# EAGLE board PFE (EAGLE 9.6.2)
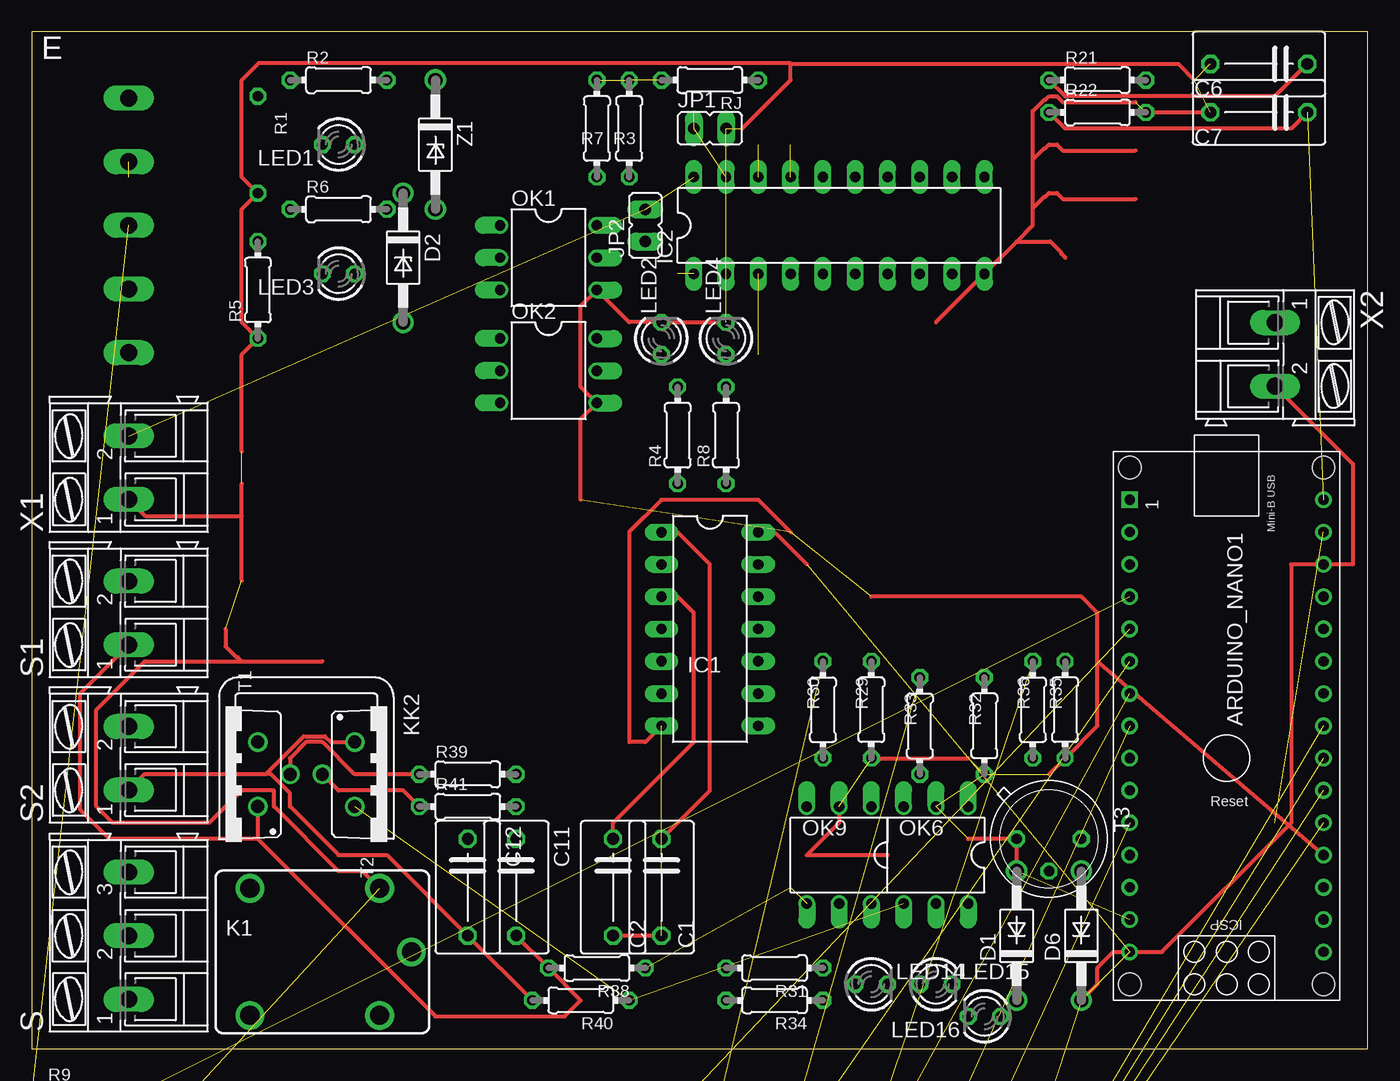
[diagram p0: board, top side]
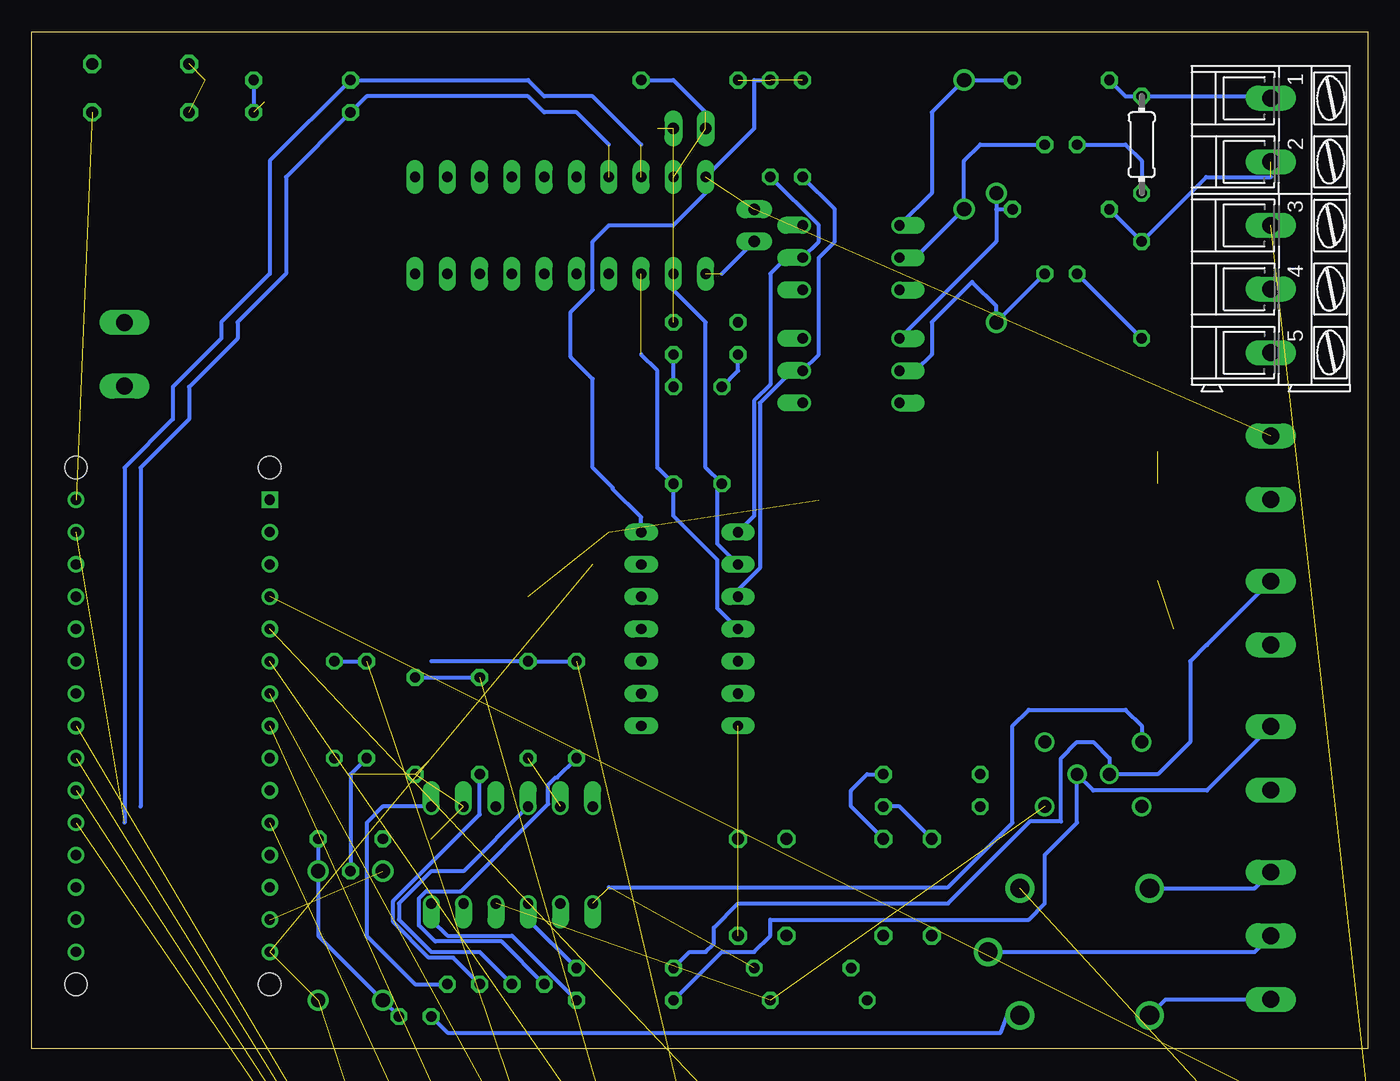
[diagram p1: board, bottom side, seen from below]

Size 105.08 x 80 mm. Coordinates in mm from the lower left corner, seen from the top.
Outline: 0,0 105.08,0 105.08,80 0,80 0,0
Copper layers (1*16): Top 0.035mm / dielectric 1.5mm / Bottom 0.035mm
Design rules "default": minimum track width 6mil, minimum drill 0.35mm, track to track 6mil, track to pad 6mil, pad to pad 6mil, via to via 6mil, smd to smd 6mil, copper to edge 40mil, drill to drill 6mil, minimum pad ring 10mil, minimum via ring 8mil, stop-mask expansion 4mil, vias tented up to drill 0mil, thermal gap 10mil

## Footprints (pad centres in the part's own frame; a part is rotated, then mirrored left to right if it is on the bottom)
ARDUINO_NANO = drill 0.8 square: 1 -20.32,-7.62 | drill 0.8: 2 -17.78,-7.62; 3 -15.24,-7.62; 4 -12.7,-7.62; 5 -10.16,-7.62; 6 -7.62,-7.62; 7 -5.08,-7.62; 8 -2.54,-7.62; 9 0,-7.62; 10 2.54,-7.62; 11 5.08,-7.62; 12 7.62,-7.62; 13 10.16,-7.62; 14 12.7,-7.62; 15 15.24,-7.62; 16 15.24,7.62; 17 12.7,7.62; 18 10.16,7.62; 19 7.62,7.62; 20 5.08,7.62; 21 2.54,7.62; 22 0,7.62; 23 -2.54,7.62; 24 -5.08,7.62; 25 -7.62,7.62; 26 -10.16,7.62; 27 -12.7,7.62; 28 -15.24,7.62; 29 -17.78,7.62; 30 -20.32,7.62 | hole 1.778: -22.86,-7.62; -22.86,7.62; 17.78,7.62; 17.78,-7.62
C075-052X106 = drill 0.914 octagon: 1 -3.81,0; 2 3.81,0
DO41-10 = drill 1.118: A 5.08,0; C -5.08,0
DO41Z10 = drill 1.118: A 5.08,0; C -5.08,0
AK300/5 = drill 1.321 long: 1 -10.008,0; 2 -5.004,0; 3 0,0; 4 5.004,0; 5 10.008,0
DIL14 = drill 0.813 long: 1 -7.62,-3.81; 2 -5.08,-3.81; 3 -2.54,-3.81; 4 0,-3.81; 5 2.54,-3.81; 6 5.08,-3.81; 7 7.62,-3.81; 8 7.62,3.81; 9 5.08,3.81; 10 2.54,3.81; 11 0,3.81; 12 -2.54,3.81; 13 -5.08,3.81; 14 -7.62,3.81
DIL20 = drill 0.813 long: 1 -11.43,-3.81; 2 -8.89,-3.81; 3 -6.35,-3.81; 4 -3.81,-3.81; 5 -1.27,-3.81; 6 1.27,-3.81; 7 3.81,-3.81; 8 6.35,-3.81; 9 8.89,-3.81; 10 11.43,-3.81; 11 11.43,3.81; 12 8.89,3.81; 13 6.35,3.81; 14 3.81,3.81; 15 1.27,3.81; 16 -1.27,3.81; 17 -3.81,3.81; 18 -6.35,3.81; 19 -8.89,3.81; 20 -11.43,3.81
JP1 = drill 0.914 long: 1 0,-1.27; 2 0,1.27
CQ1 = drill 1.5: 1 4.5,-5; 2 4.5,5; C 7,0; NC -5.7,-5; NO -5.7,5
LED3MM = drill 0.813 octagon: A -1.27,0; K 1.27,0
DIL06 = drill 0.813 offset: 1 -2.54,-3.81; 2 0,-3.81; 3 2.54,-3.81; 4 2.54,3.81; 5 0,3.81; 6 -2.54,3.81
0204/7 = drill 0.813 octagon: 1 -3.81,0; 2 3.81,0
AK300/3 = drill 1.321 long: 1 -5.004,0; 2 0,0; 3 5.004,0
AK300/2 = drill 1.321 long: 1 -2.515,0; 2 2.489,0
SOT78A = drill 1.016: G 2.54,0; T1 -2.54,0; T2 0,-2.54
TO5 = drill 0.813 octagon: 1 0,-2.54; 2 2.54,0; 3 0,2.54
DIL18 = drill 0.813 long: 1 -10.16,-3.81; 2 -7.62,-3.81; 3 -5.08,-3.81; 4 -2.54,-3.81; 5 0,-3.81; 6 2.54,-3.81; 7 5.08,-3.81; 8 7.62,-3.81; 9 10.16,-3.81; 10 10.16,3.81; 11 7.62,3.81; 12 5.08,3.81; 13 2.54,3.81; 14 0,3.81; 15 -2.54,3.81; 16 -5.08,3.81; 17 -7.62,3.81; 18 -10.16,3.81

## Placement (x,y rotation side)
ARDUINO_NANO1  [ARDUINO_NANO]  93.98,22.86 270 top
C1  [C075-052X106]  49.53,12.7 270 top
C2  [C075-052X106]  45.72,12.7 270 top
C6  [C075-052X106]  96.52,77.47 180 top
C7  [C075-052X106]  96.52,73.66 180 top
C11  [C075-052X106]  38.1,12.7 270 top
C12  [C075-052X106]  34.29,12.7 270 top
D1  1N4004  [DO41-10]  77.47,8.89 90 top
D2  1N4728  [DO41Z10]  29.21,62.23 270 top
D3  1N4728  [DO41Z10]  5.08,-13.97 0 top  (outside the outline)
D4  1N4728  [DO41Z10]  5.08,-36.83 0 top  (outside the outline)
D5  1N4728  [DO41Z10]  5.08,-64.77 0 top  (outside the outline)
D6  1N4004  [DO41-10]  82.55,8.89 90 top
D7  1N4728  [DO41Z10]  5.08,-92.71 0 top  (outside the outline)
D8  1N4728  [DO41Z10]  5.08,-120.65 0 top  (outside the outline)
E  [AK300/5]  7.62,64.77 270 bottom
E1  [AK300/5]  12.7,-26.67 0 top  (outside the outline)
E2  [AK300/5]  12.7,-54.61 0 top  (outside the outline)
E3  [AK300/5]  12.7,-82.55 0 top  (outside the outline)
E4  [AK300/5]  12.7,-110.49 0 top  (outside the outline)
IC1  74HC14N  [DIL14]  53.34,33.02 270 top
IC2  74HC245N  [DIL20]  63.5,64.77 0 top
JP1  [JP1]  53.34,72.39 270 top
JP2  [JP1]  48.26,64.77 0 top
K1  CQ1-12V  [CQ1]  22.86,7.62 0 top
KK2  D01S  [D01S]  21.59,27.94 180 top
LED1  TLLY4400  [LED3MM]  24.13,71.12 180 top
LED2  TLLY4400  [LED3MM]  49.53,55.88 90 top
LED3  TLLY4400  [LED3MM]  24.13,60.96 180 top
LED4  TLLY4400  [LED3MM]  54.61,55.88 90 top
LED5  TLLY4400  [LED3MM]  1.27,-130.81 0 top  (outside the outline)
LED6  TLLY4400  [LED3MM]  1.27,-135.89 0 top  (outside the outline)
LED7  TLLY4400  [LED3MM]  1.27,-140.97 0 top  (outside the outline)
LED8  TLLY4400  [LED3MM]  1.27,-146.05 0 top  (outside the outline)
LED9  TLLY4400  [LED3MM]  1.27,-170.18 0 top  (outside the outline)
LED14  TLLY4400  [LED3MM]  66.04,5.08 0 top
LED15  TLLY4400  [LED3MM]  71.12,5.08 0 top
LED16  TLLY4400  [LED3MM]  74.93,2.54 180 top
OK1  4N37  [DIL06]  40.64,62.23 270 top
OK2  4N37  [DIL06]  40.64,53.34 270 top
OK6  MOC3021M  [DIL06]  71.12,15.24 180 top
OK9  MOC3021M  [DIL06]  63.5,15.24 180 top
R1  [0204/7]  17.78,71.12 90 bottom
R2  [0204/7]  24.13,76.2 0 top
R3  [0204/7]  46.99,72.39 90 top
R4  [0204/7]  50.8,48.26 90 top
R5  [0204/7]  17.78,59.69 90 top
R6  [0204/7]  24.13,66.04 0 top
R7  [0204/7]  44.45,72.39 90 top
R8  [0204/7]  54.61,48.26 90 top
R9  [0204/7]  3.81,-3.81 0 top  (outside the outline)
R10  [0204/7]  3.81,-8.89 0 top  (outside the outline)
R11  [0204/7]  3.81,-151.13 0 top  (outside the outline)
R12  [0204/7]  16.51,-36.83 0 top  (outside the outline)
R13  [0204/7]  3.81,-43.18 0 top  (outside the outline)
R14  [0204/7]  16.51,-64.77 0 top  (outside the outline)
R15  [0204/7]  3.81,-71.12 0 top  (outside the outline)
R16  [0204/7]  16.51,-92.71 0 top  (outside the outline)
R17  [0204/7]  3.81,-99.06 0 top  (outside the outline)
R18  [0204/7]  16.51,-120.65 0 top  (outside the outline)
R19  [0204/7]  3.81,-127 0 top  (outside the outline)
R20  [0204/7]  3.81,-156.21 0 top  (outside the outline)
R21  [0204/7]  83.82,76.2 0 top
R22  [0204/7]  83.82,73.66 0 top
R23  [0204/7]  3.81,-161.29 0 top  (outside the outline)
R24  [0204/7]  3.81,-166.37 0 top  (outside the outline)
R25  [0204/7]  3.81,-175.26 0 top  (outside the outline)
R29  [0204/7]  66.04,26.67 90 top
R30  [0204/7]  62.23,26.67 270 top
R31  [0204/7]  58.42,6.35 180 top
R32  [0204/7]  74.93,25.4 90 top
R33  [0204/7]  69.85,25.4 270 top
R34  [0204/7]  58.42,3.81 180 top
R35  [0204/7]  81.28,26.67 90 top
R36  [0204/7]  78.74,26.67 270 top
R38  [0204/7]  44.45,6.35 180 top
R39  [0204/7]  34.29,21.59 0 top
R40  [0204/7]  43.18,3.81 180 top
R41  [0204/7]  34.29,19.05 0 top
RJ  [0204/7]  53.34,76.2 180 top
S  [AK300/3]  7.62,8.89 90 top
S1  [AK300/2]  7.62,34.29 90 top
S2  [AK300/2]  7.62,22.86 90 top
T1  BTA316-600B  [SOT78A]  17.78,21.59 90 top
T2  BTA316-600B  [SOT78A]  25.4,21.59 270 top
T3  2N2219  [TO5]  80.01,16.51 270 top
ULN2803A1  [DIL18]  12.7,-182.88 0 top  (outside the outline)
X1  [AK300/2]  7.62,45.72 90 top
X2  [AK300/2]  97.79,54.61 270 top
Z1  1N4728  [DO41Z10]  31.75,71.12 270 top

## Library data of the parts
ARDUINO_NANO1 = ArduinoNanoV30
C1 C2 C6 C7 C11 C12 = rcl; SPICEPREFIX: C
D1-D8 Z1 = diode
E E1-E4 S S1 S2 X1 X2 = con-ptr500; OC_FARNELL: unknown; OC_NEWARK: unknown
IC1 IC2 = 74xx-eu
JP1 JP2 = jumper
K1 = relay; OC_FARNELL: unknown; OC_NEWARK: unknown
KK2 = heatsink
LED1-LED9 LED14-LED16 = led; MF: VISHAY SEMICONDUCTOR; OC_FARNELL: 1612439
OK1 OK2 = optocoupler; MF: FAIRCHILD SEMICONDUCTOR; MPN: 4N37; OC_FARNELL: 1612456; OC_NEWARK: 72K9948
OK6 OK9 = optocoupler; MF: FAIRCHILD SEMICONDUCTOR; MPN: MOC3021-M; OC_FARNELL: 1021365; OC_NEWARK: 95B7895
R1-R25 R29-R36 R38-R41 RJ = rcl; SPICEPREFIX: R
T1 T2 = nxp_60; 12NC: 9340 600 72127
T3 = transistor
ULN2803A1 = uln-udn

## Nets
5V: ARDUINO_NANO1.12
GND: ARDUINO_NANO1.14 ARDUINO_NANO1.19 C1.2 C2.2 C6.2 C7.2 D1.A D3.A IC1.7 IC2.10 JP1.2 K1.2 LED1.K LED2.K LED3.K LED4.K OK1.4 OK2.4 OK6.2 OK9.2 R1.1 R5.1 R10.2 R21.2 R22.2 R29.1 R32.1 R35.1 T3.1 ULN2803A1.8 ULN2803A1.9 X1.1
GND1: D4.A R13.2
GND2: D5.A R15.2
GND3: D7.A R17.2
GND4: D8.A R19.2
N$1: E.1 R1.2 R2.1
N$2: D2.A LED3.A OK2.2
N$3: OK1.1 R2.2 Z1.C
N$4: C1.1 IC1.1 OK1.5 R3.1
N$6: D2.C OK2.1 R6.2
N$7: ARDUINO_NANO1.11 LED9.A
N$8: E.2 R5.2 R6.1
N$9: C2.1 IC1.3 OK2.5 R7.1
N$10: LED6.K R20.1
N$11: ARDUINO_NANO1.4 D3.C R9.2 R10.1
N$12: ARDUINO_NANO1.29 C6.1 IC2.18 R21.1
N$13: E.3 R9.1
N$15: LED4.A R8.2
N$16: E1.3 R12.1
N$18: LED1.A OK1.2 Z1.A
N$19: IC1.4 IC2.3 R8.1
N$20: ARDUINO_NANO1.6 D5.C R14.2 R15.1
N$21: E2.3 R14.1
N$22: LED7.K R23.1
N$23: E3.3 R16.1
N$24: ARDUINO_NANO1.22 LED7.A
N$25: IC2.19 JP1.1 RJ.1
N$26: LED14.A R30.2
N$27: E4.3 R18.1
N$28: OK6.4 R40.1 T2.G
N$29: R32.2 R33.1 ULN2803A1.15
N$30: ARDUINO_NANO1.5 D4.C R12.2 R13.1
N$31: LED2.A R4.2
N$32: R25.2 ULN2803A1.1
N$34: ARDUINO_NANO1.7 D7.C R16.2 R17.1
N$35: LED14.K OK9.1
N$36: ARDUINO_NANO1.8 D8.C R18.2 R19.1
N$38: LED15.A R33.2
N$39: IC2.1 JP2.1
N$40: ARDUINO_NANO1.23 LED8.A
N$41: R11.2 ULN2803A1.2
N$42: LED15.K OK6.1
N$43: ARDUINO_NANO1.30 C7.1 IC2.17 R22.1
N$44: IC1.2 IC2.2 R4.1
N$45: LED5.K R11.1
N$46: LED8.K R24.1
N$47: R36.2 T3.2
N$48: K1.NO S.3
N$49: LED9.K R25.1
N$50: R20.2 ULN2803A1.3
N$51: ARDUINO_NANO1.20 LED5.A
N$52: R23.2 ULN2803A1.4
N$53: OK9.4 R38.1 T1.G
N$55: R35.2 R36.1 ULN2803A1.16
N$56: D1.C D6.A LED16.A T3.3
N$57: OK9.6 R31.1
N$58: OK6.6 R34.1
N$59: R31.2 R39.1 S1.2 T1.T2
N$60: R29.2 R30.1 ULN2803A1.14
N$61: C11.1 R39.2
N$62: C12.1 R41.2
N$63: K1.NC S.1
N$64: K1.C S.2
N$65: C11.2 R38.2 S1.1 T1.T1
N$66: ARDUINO_NANO1.21 LED6.A
N$67: R34.2 R41.1 S2.2 T2.T2
N$68: K1.1 LED16.K
N$70: R24.2 ULN2803A1.5
N$71: C12.2 R40.2 S2.1 T2.T1
VCC: ARDUINO_NANO1.15 D6.C IC1.14 IC2.20 JP2.2 R3.2 R7.2 RJ.2 ULN2803A1.10 X1.2 X2.2

## Tracks (layer width: path | path; a pad name or v marks a point on that pad's centre or on a via)
GND  (20 unrouted)
  Top 0.305: 16.51,36.83 16.51,41.91 | 16.51,41.91 16.51,44.45 | 16.51,46.99 16.51,54.61 R5.1 16.51,57.15 16.51,66.04 R1.1 16.51,68.58 16.51,76.2 17.87,77.56 59.6,77.56 59.69,77.47 | 43.18,43.18 43.18,49.53 OK2.4 43.18,52.07 43.18,58.42 OK1.4 46.99,57.15 LED2.K LED4.K | 59.69,77.47 59.69,76.2 55.88,72.39 | 91.44,76.2 90.17,77.47 59.69,77.47 | C1.2 C2.2 | 71.12,57.15 IC2.10 77.47,63.5 | IC1.7 48.26,24.13 46.99,24.13 46.99,40.64 49.53,43.18 57.15,43.18 59.69,40.64 | R29.1 73.66,22.86 | 80.01,21.59 R35.1 83.82,25.4 83.82,30.48 | 83.82,30.48 83.82,34.29 82.55,35.56 66.04,35.56 | OK9.2 63.5,17.78 60.96,15.24 67.31,15.24 | 81.28,62.23 80.97,62.53 80.97,62.63 80.11,63.5 77.47,63.5 | 77.47,63.5 78.74,64.77 78.74,66.14 | 86.82,66.85 81.09,66.85 80.63,67.31 80.01,67.31 79.7,67 79.61,67 78.74,66.14 | 86.82,70.66 81.09,70.66 80.63,71.12 80.01,71.12 79.7,70.81 79.61,70.81 78.74,69.94 | 78.74,66.14 78.74,69.94 | 78.74,69.94 78.74,73.75 79.61,74.62 79.7,74.62 80.01,74.93 80.63,74.93 81.09,74.47 86.82,74.47 | X1.1 8.91,41.91 16.51,41.91 | 16.51,30.48 16.2,30.79 16.11,30.79 15.24,31.66 15.24,33.02 | 16.51,30.48 22.86,30.48 | 73.66,16.51 T3.1 D1.A | K1.2 26.01,13.97 24.13,13.97 19.05,19.05 19.05,20.32 16.51,20.32 13.97,17.78 6.35,17.78 5.08,19.05 5.08,26.67 8.89,30.48 16.51,30.48 | ARDUINO_NANO1.19 83.82,30.48 | R22.2 C7.2
  Bottom 0.305: LED1.K 19.05,71.12 17.78,69.85 R1.1 | LED3.K R5.1 | R21.2 R22.2
GND1  (1 unrouted)
GND2  (1 unrouted)
GND3  (1 unrouted)
GND4  (1 unrouted)
N$1
  Bottom 0.305: E.1 7.77,74.93 R1.2 19.05,74.93 R2.1
N$2
  Bottom 0.305: LED3.A D2.A 29.21,58.42 31.11,60.33 34.29,57.15 34.29,54.61 35.56,53.34 OK2.2
N$3
  Bottom 0.305: R2.2 Z1.C 34.29,73.66 34.29,67.31 OK1.1
N$4
  Top 0.305: IC1.1 50.8,40.64 53.34,38.1 53.34,20.32 C1.1
  Bottom 0.305: R3.1 43.18,64.77 43.18,63.5 OK1.5 45.72,62.23 46.99,60.96 46.99,52.26 48.26,50.99 48.26,41.91 IC1.1
N$6
  Bottom 0.305: D2.C 29.21,66.04 | 29.21,66.04 29.21,63.5 OK2.1 | 29.21,66.04 R6.2
N$7  (1 unrouted)
N$8  (1 unrouted)
  Bottom 0.305: R6.1 R5.2 12.7,68.58 7.62,68.58
N$9
  Top 0.305: C2.1 45.72,17.78 52.07,24.13 52.07,34.29 50.8,35.56 IC1.3
  Bottom 0.305: R7.1 41.91,66.04 41.91,63.5 43.18,62.23 43.18,54.61 OK2.5 45.26,53.34 47.8,50.8 47.8,37.8 49.53,36.08 IC1.3
N$10  (1 unrouted)
N$11  (3 unrouted)
N$12  (2 unrouted)
  Top 0.305: C6.1 97.79,74.93 81.28,74.93 R21.1
  Bottom 0.305: 57.15,71.12 60.96,74.93 64.77,74.93 66.04,76.2 R21.1 86.36,69.85 86.36,60.96 90.17,57.15 90.17,55.88 93.98,52.07 93.98,49.53 97.79,45.72 97.79,17.78
N$13  (1 unrouted)
N$15
  Bottom 0.305: R8.2 LED4.A
N$16  (1 unrouted)
N$18
  Bottom 0.305: LED1.A 30.48,71.12 31.75,69.85 Z1.A 35.56,62.23 OK1.2
N$19  (1 unrouted)
  Bottom 0.305: IC1.4 51.16,34.65 51.16,38.46 54.61,41.91 R8.1 55.88,45.72 55.88,53.34 57.15,54.61
N$20  (3 unrouted)
N$21  (1 unrouted)
N$22  (1 unrouted)
N$23  (1 unrouted)
N$24  (1 unrouted)
N$25  (2 unrouted)
  Bottom 0.305: RJ.1 54.61,76.2 52.07,73.66
N$26
  Bottom 0.305: R30.2 63.75,21.34 63.9,21.34 64.47,20.77 64.47,19.26 71.33,12.39 74.06,12.39 74.62,11.83 74.62,9.71 73.35,8.43 68.12,8.43 LED14.A
N$27  (1 unrouted)
N$28  (2 unrouted)
N$29  (1 unrouted)
  Bottom 0.305: R32.2 R33.1
N$30  (3 unrouted)
N$31
  Bottom 0.305: R4.2 49.53,53.34 LED2.A
N$32  (1 unrouted)
N$34  (3 unrouted)
N$35
  Bottom 0.305: OK9.1 71.12,13.97 73.66,13.97 76.2,11.43 76.2,10.16 73.66,7.62 69.85,7.62 LED14.K
N$36  (3 unrouted)
N$38
  Bottom 0.305: LED15.A 71.93,7.16 73.85,7.16 76.66,9.97 76.66,11.62 69.85,18.43 R33.2
N$39  (1 unrouted)
  Bottom 0.305: 50.8,60.96 JP2.1
N$40  (1 unrouted)
N$41  (1 unrouted)
N$42
  Bottom 0.305: OK6.1 77.47,19.05 78.74,17.78 78.74,8.89 74.93,5.08 LED15.K
N$43  (2 unrouted)
  Top 0.305: C7.1 99.06,72.39 81.28,72.39 R22.1
  Bottom 0.305: 59.69,71.12 62.23,73.66 64.77,73.66 66.04,74.93 78.74,74.93 R22.1 85.09,68.58 85.09,60.96 88.9,57.15 88.9,55.88 92.71,52.07 92.71,49.53 96.52,45.72 96.52,19.05
N$44  (1 unrouted)
  Bottom 0.305: IC1.2 51.16,39.73 51.16,44.09 R4.1 52.07,45.72 52.07,57.15 54.61,59.69
N$45  (1 unrouted)
N$46  (1 unrouted)
N$47
  Bottom 0.305: R36.2 80.01,21.59 T3.2
N$48
  Bottom 0.305: K1.NO 8.89,12.62 S.3
N$49  (1 unrouted)
N$50  (1 unrouted)
N$51  (1 unrouted)
N$52  (1 unrouted)
N$53  (2 unrouted)
  Bottom 0.305: 59.69,12.7 33.02,12.7 27.94,17.78 27.94,25.4 26.67,26.67 19.05,26.67 17.78,25.4 T1.G
N$55  (1 unrouted)
  Bottom 0.305: R35.2 R36.1
N$56
  Bottom 0.305: T3.3 D6.A 82.55,8.89 D1.C LED16.A
N$57
  Bottom 0.305: R31.1 66.04,10.16 OK9.6
N$58
  Bottom 0.305: OK6.6 73.66,10.16 72.39,8.89 67.31,8.89 R34.1
N$59
  Top 0.305: R39.1 25.4,21.59 22.86,24.13 21.59,24.13 20.32,22.86 T1.T2
  Bottom 0.305: R31.2 53.34,7.62 52.07,7.62 51.44,8.26 51.44,9.53 49.53,11.43 33.02,11.43 26.58,17.87 24.13,17.87 24.13,22.86 22.86,24.13 21.59,24.13 20.32,22.86 T1.T2 16.51,21.59 13.97,24.13 13.97,30.48 12.7,31.75 12.65,31.75 S1.2
N$60  (1 unrouted)
  Bottom 0.305: R30.1 R29.2 73.66,30.48
N$61
  Bottom 0.305: C11.1 40.64,19.05 40.64,20.32 39.37,21.59 R39.2
N$62
  Bottom 0.305: C12.1 36.83,19.05 R41.2
N$63
  Bottom 0.305: K1.NC 15.89,3.89 S.1
N$64
  Bottom 0.305: K1.C 8.89,7.62 S.2
N$65
  Top 0.305: C11.2 R38.2 43.18,3.81 41.91,2.54 31.75,2.54 17.78,16.51 | T1.T1 17.78,16.51 | 17.78,16.51 6.09,16.51 3.81,18.79 3.81,27.96 S1.1
N$66  (1 unrouted)
N$67
  Top 0.305: R41.1 29.21,20.32 24.13,20.32 T2.T2
  Bottom 0.305: R34.2 50.8,7.62 48.26,7.62 46.99,8.89 46.99,10.16 26.67,10.16 25.4,11.43 25.4,15.24 22.86,17.78 T2.T2 21.59,20.32 12.65,20.32 S2.2
N$68
  Bottom 0.305: LED16.K 72.39,1.27 28.86,1.27 28.33,2.62 K1.1
N$70  (1 unrouted)
N$71
  Top 0.305: R40.2 C12.2 27.94,15.24 24.13,15.24 20.32,19.05 20.32,20.08 18.79,21.61 18.43,21.61 | S2.1 8.89,21.61 18.43,21.61 | 18.43,21.61 21.4,24.59 23.05,24.59 23.51,24.13 T2.T1
VCC  (7 unrouted)
  Top 0.305: X2.2 103.91,46 103.91,38.1 99.06,38.1 99.06,17.78 88.9,7.62 85.09,7.62 83.82,6.35 83.82,5.08 D6.C | 60.96,38.1 58.42,40.64 IC1.14
  Bottom 0.305: R3.2 48.26,76.2 48.26,72.39 IC2.20 52.07,67.31 54.61,64.77 59.69,64.77 60.96,63.5 60.96,59.69 62.69,57.96 62.69,54.42 60.96,52.69 60.96,45.72 59.38,44.15 59.38,44.05 57.15,41.81 IC1.14